# Altium PCB PCB1.PcbDoc
Units mil, origin at the board's own origin, x right, y up, seen from the top; angles counter-clockwise.
Board outline 6000 x 4000 mil, 2 copper layers (Top Layer, Bottom Layer); 27 components, 18 nets, 85 pads, 5 vias.
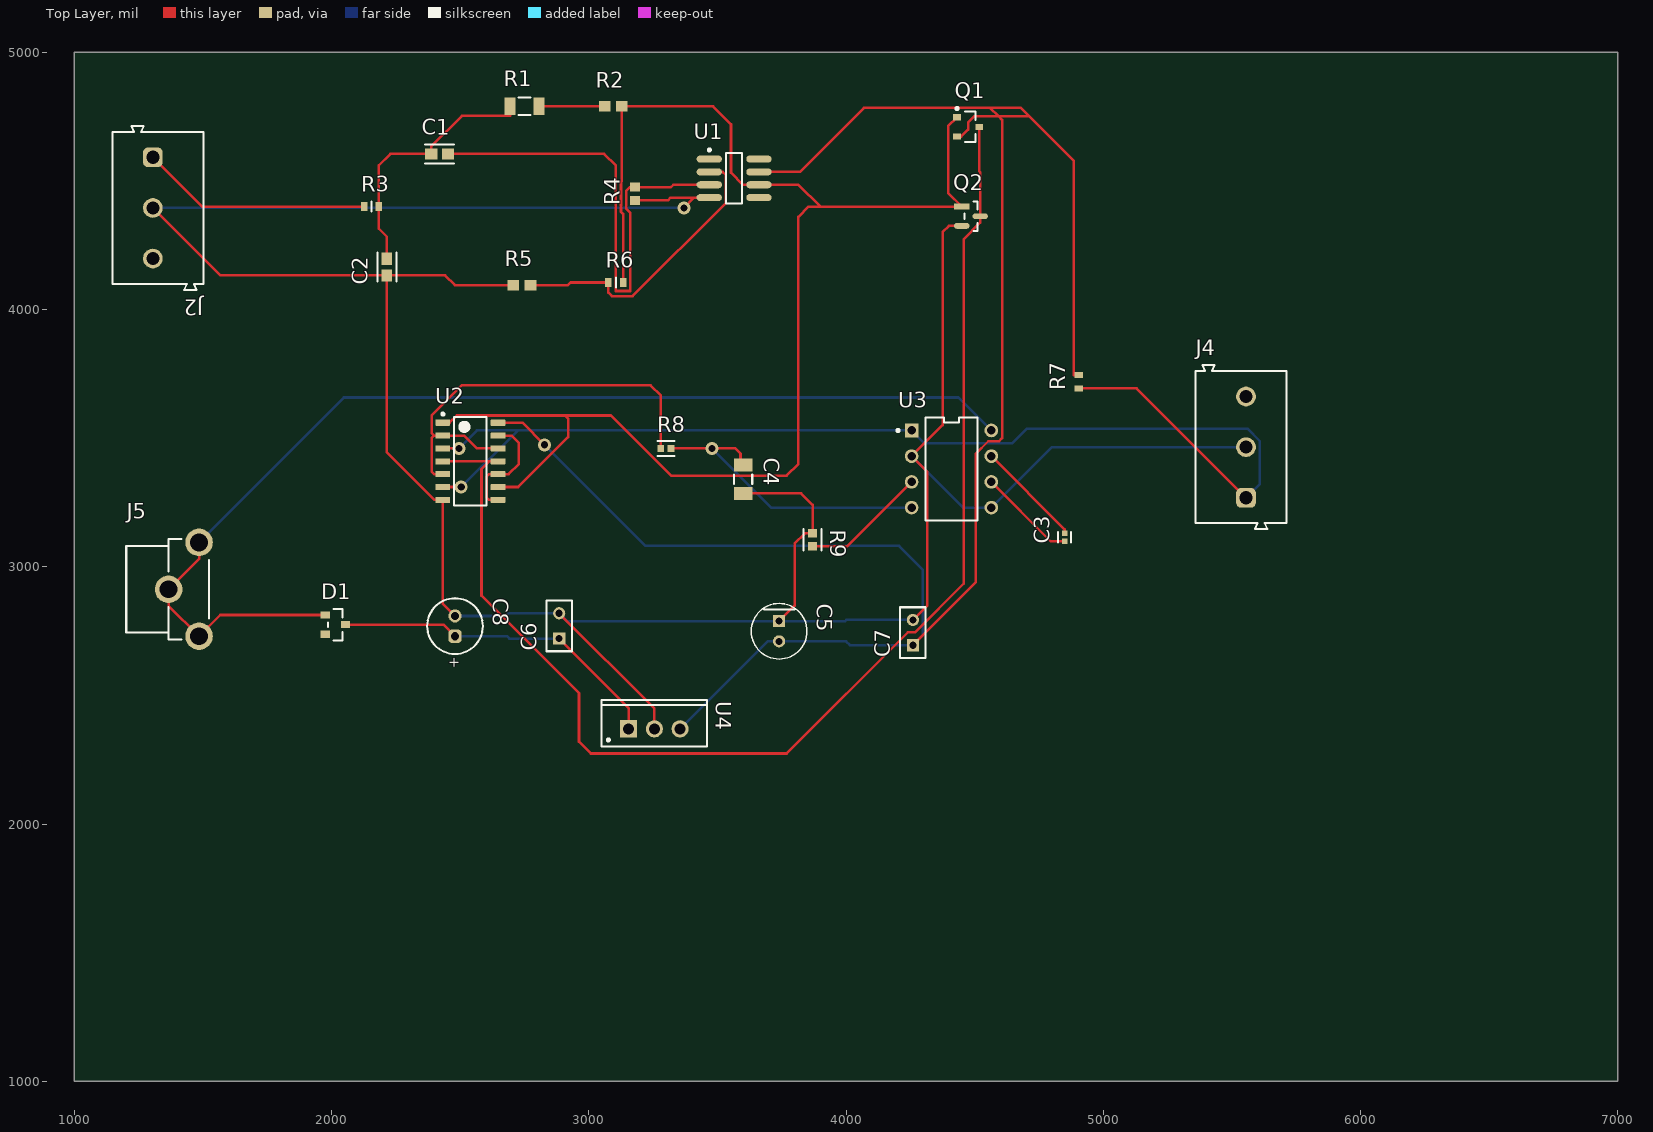
[diagram p0: Top Layer view]
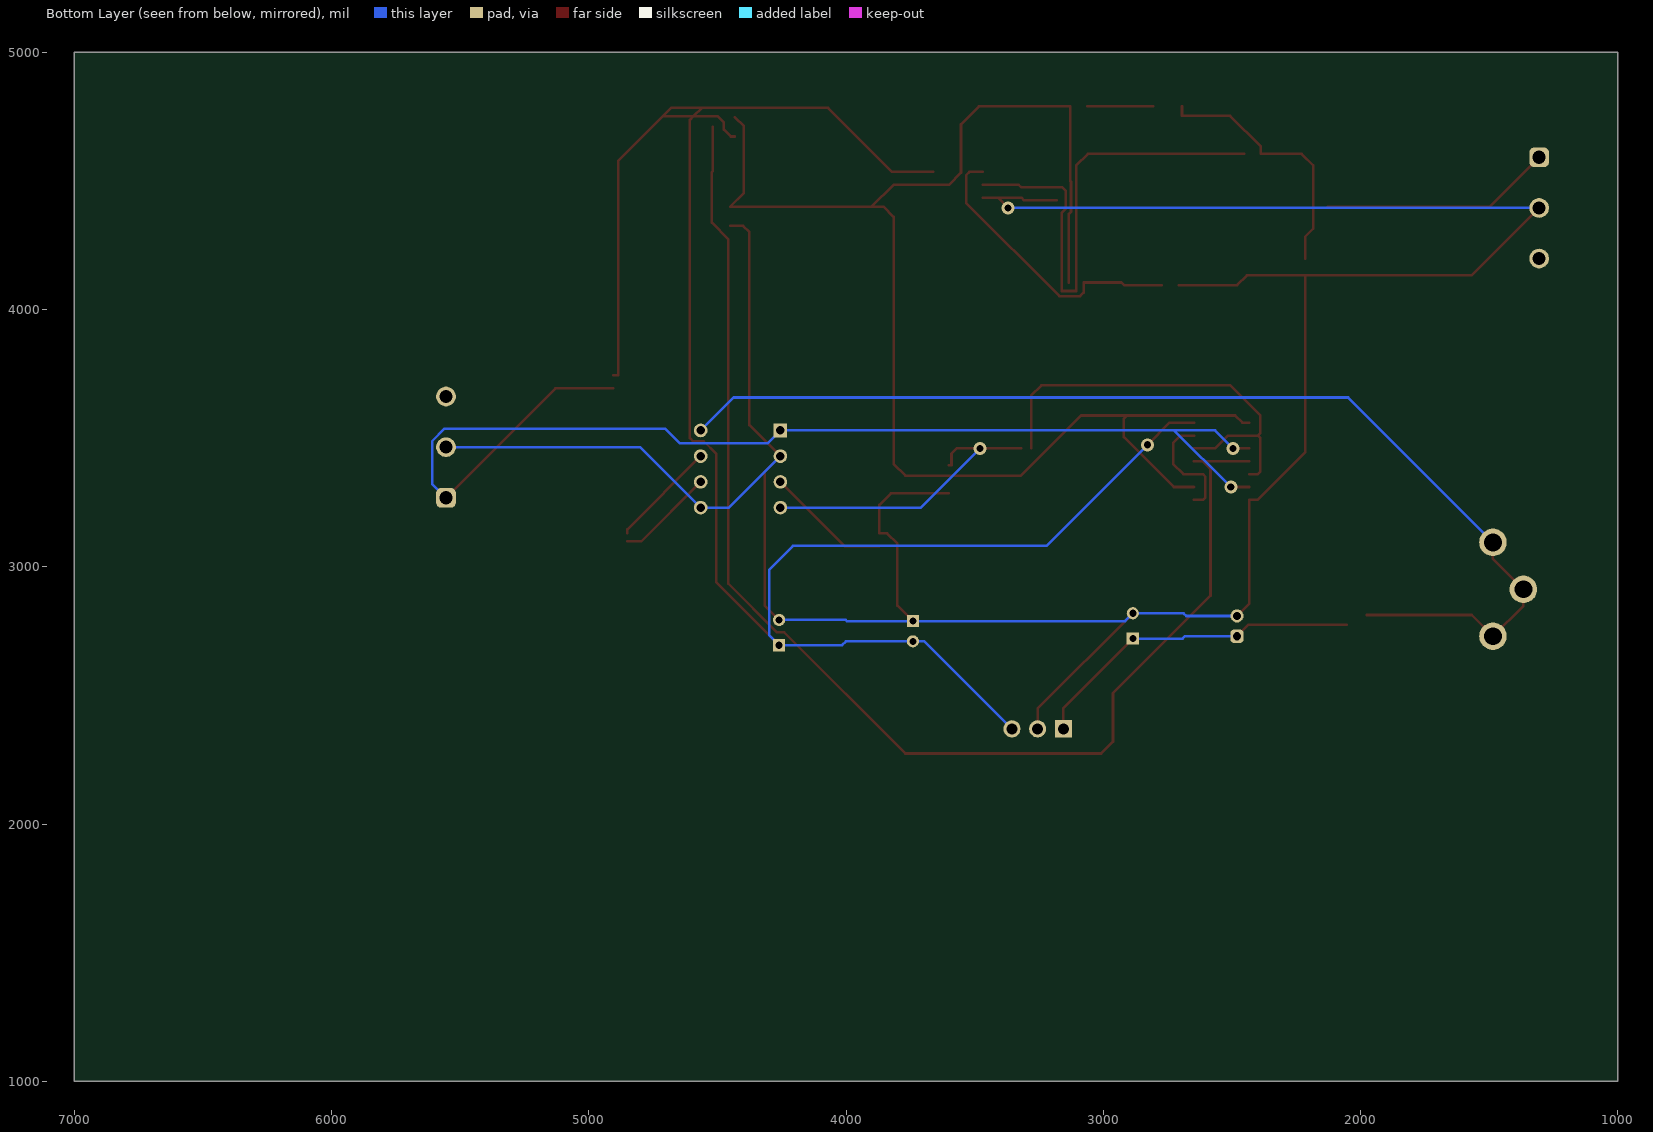
[diagram p1: Bottom Layer view, seen from below]
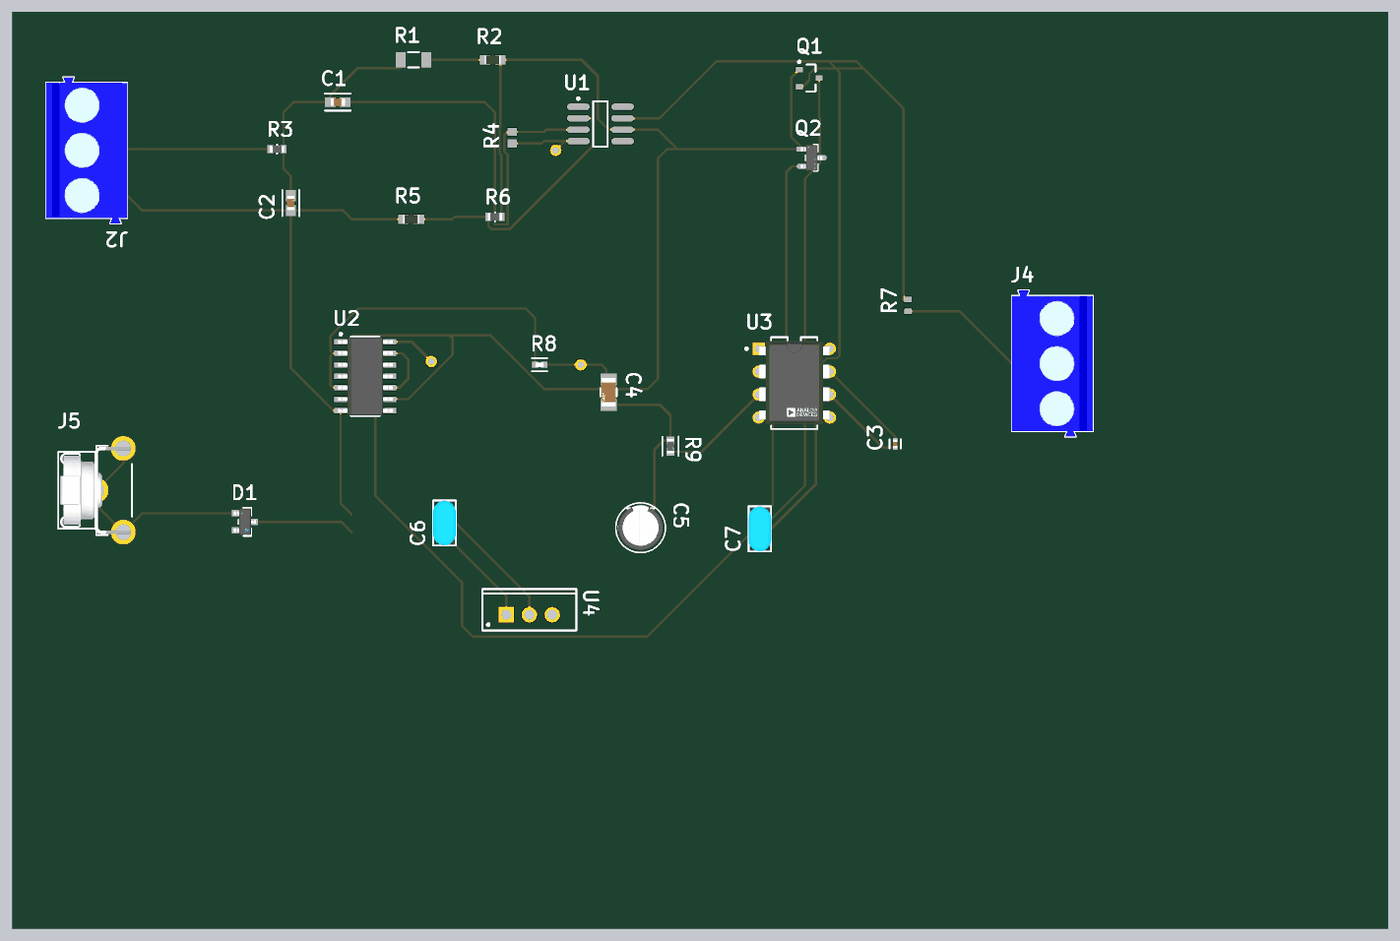
[diagram p2: 3D render of the assembled board from above, using the file's embedded part models]

## Layer stack, top to bottom
Top Solder: solder mask 0.4, Solder Resist, Dk 3.5
Top Layer: signal copper 1.4
Dielectric 1: dielectric 12.6, FR-4, Dk 4.8
Bottom Layer: signal copper 1.4
Bottom Solder: solder mask 0.4, Solder Resist, Dk 3.5

## Board outline
1000,1000 7000,1000 7000,5000 1000,5000

## Design rules (kind name [scope] priority, off if disabled: settings)
Clearance [All] p1: gap=10 ignorepadtopadclearanceinfootprint=FALSE except(0: Arc-Hole Track-Hole SMDPad-Hole THPad-Hole Via-Hole Fill-Hole Poly-Hole Region-Hole Text-Hole)
PolygonConnect [All] p1: connectstyle=Relief reliefconductorwidth=10 reliefentries=4 polygonreliefangle="90 Angle" airgapwidth=10
RoutingVias [All] p1: holewidth=28 width=50 viastyle="Through Hole" minholewidth=28 minwidth=50 maxholewidth=28 maxwidth=50
SolderMaskExpansion [All] p1: expansion=4 istentingtop=FALSE
Width [All] p1: maxlimit=10 minlimit=10 preferedwidth=10
30 further rules are at their usual default settings.

## Components (designator, comment, footprint, x,y, rotation, side; value= is the part's Value field where it differs from the comment)
C1 "1n" FP-0603-L_1_6_0_15-W_0_81-IPC_A 2420,4605 r0 top
C2 "1n" FP-0603-L_1_6_0_15-W_0_81-IPC_A 2215,4165 r90 top
C3 "100pF" FP-C0402-BB-MFG 4850,3115 r90 top value="100 pF"
C4 "4.7nF" FP-1206-L_3_2_0_2-W_1_6_0-IPC_B 3600,3340.15 r270 top
C5 "10 uF" FP-RAD-TH-D_5_0_5-L_11_1-MFG 3740,2749.37 r270 top
C6 "0.1 uF" FP-RDE0P1-MFG 2885,2770 r90 top
C7 "0.1 uF" FP-RDE0P1-MFG 4260,2744.21 r90 top
C8 "0.22 uF" WCAP-ATG8_D5H11 52480,-47230.63 r270 top
D1 "BAS70-00-E3-08" FP-6_541-5014_01-4-MFG 2015,2775 r0 top value=1.5pF
J2 "691101710003" 691101710003 1325,4395 r270 top
J4 "691101710003" 691101710003 5535.31,3465.01 r90 top
J5 "594" FP-594-MFG 1362.36,2912.48 r90 top
Q1 "PMOS" INF-SOT23_L 4475,4710 r0 top
Q2 "NMOS" FP-318-08-IPC_B 4485.83,4362.6 r0 top
R1 "RC1206FR-074K7L" FP-RC1206-0_65-IPC_B 2750,4790 r0 top
R2 "ERJ-3EKF1201V" RESC1609X55X30ML15T15 3095,4790 r0 top
R3 "ERA-3AEB242V" FP-ERA3A-MFG 2155,4400 r0 top
R4 "ERA-3AEB562V" RESC1608X55X30NL20T20 3180,4450 r90 top
R5 "ERJ-3EKF1201V" RESC1609X55X30ML15T15 2740,4095 r0 top
R6 "ERA-3AEB242V" FP-ERA3A-MFG 3105,4105 r0 top
R7 "2.2k" RESC1608X55X25LL10T15 4905,3719.41 r90 top
R8 "4.7K" FP-CRCW0402-e3-IPC_A 3299.77,3460 r0 top
R9 "10K" FP-ERA3A-IPC_C 3870,3105 r270 top
U1 "LT1028CS8#PBF" LT-S8-8_M 3565,4510 r0 top
U2 "CD4007UBMT" D0014A_N 2540,3410 r0 top
U3 "AD654JNZ" FP-N-8-MFG 4410,3380 r0 top
U4 "L7805CV" TO220 3255,2370 r0 top

## Footprints (in the part's own frame and the unit in brackets; to place one, negate y for a bottom-side part, rotate by r counter-clockwise, add the part's x,y. Pads: shape width x height; smd on the part's side, far side on the other; paste and mask are expansions set on the pad)
691101710003 [mm] "5,00mm - modular - blue - Horizontal entry with pressure clamp - 12,6mm height - 03p"
  rrect50% 1.95x1.95 hole 1.3: 1(-5,-0.5)
  round 1.95 hole 1.3: 2(0,-0.5) 3(5,-0.5)
  silkscreen extent -8.1,-4.5 8.1,4.5, body extent -8.1,-4.5 8.1,4.5, height 12.65
D0014A_N [mm] "SOIC, 14-Leads, Body 8.75x4mm, Pitch 1.27mm, IPC Medium Density"
  rrect17% 1.45x0.6 smd: 1(-2.725,3.81) 2(-2.725,2.54) 3(-2.725,1.27) 4(-2.725,0) 5(-2.725,-1.27) 6(-2.725,-2.54) 7(-2.725,-3.81) 8(2.725,-3.81) 9(2.725,-2.54) 10(2.725,-1.27) 11(2.725,0) 12(2.725,1.27) 13(2.725,2.54) 14(2.725,3.81)
  silkscreen extent -2.85,-4.37 1.6,4.78, body extent -3.02,-4.32 3.02,4.32, height 1.59
FP-6_541-5014_01-4-MFG [mm]
  rect 0.9x0.7 smd paste+0 mask+0: 1(-1,0.95) 2(-1,-0.95) 3(1,0)
  silkscreen extent -0.72,-1.55 0.72,1.55, body extent -1.55,-1.65 1.55,1.65, height 0.25
FP-318-08-IPC_B [mm]
  rect 1.524x0.578 smd paste+0 mask+0: 1(-0.91,0.95)
  rrect100% 1.524x0.578 smd paste+0 mask+0: 2(-0.91,-0.95) 3(0.91,0)
  silkscreen extent -0.65,-1.45 0.65,1.45, body extent -1.92,-1.7 1.92,1.7, height 0.25
FP-594-MFG [mm]
  round 2.72 hole 1.77 paste-2539.97 mask+0: 1(-4.635,-3.115) 1(0,-0.115) 1(4.635,-3.115)
  silkscreen extent -4.95,-4.08 4.95,4.07, body extent -6.09,-4.57 6.09,4.18, height 0.25
FP-0603-L_1_6_0_15-W_0_81-IPC_A [mil]
  rect 47.5x42.06 smd paste+0 mask+0: 1(-32.51,0) 2(32.51,0)
  silkscreen extent -56,-37 56,37, body extent -76,-41 76,41, height 10
FP-1206-L_3_2_0_2-W_1_6_0-IPC_B [mil]
  rect 51.36x71.11 smd paste+0 mask+0: 1(-55.15,0) 2(55.15,0)
  silkscreen extent -18,-36 18,36, body extent -91,-45 91,45, height 10
FP-C0402-BB-MFG [mm]
  rect 0.52x0.52 smd paste+0 mask+0: 1(-0.4,0) 2(0.4,0)
  silkscreen extent -0.5,-0.64 0.5,0.64, body extent -0.8,-0.4 0.8,0.4, height 0.25
FP-CRCW0402-e3-IPC_A [mil]
  rect 26.31x26.48 smd paste+0 mask+0: 1(-19.77,0) 2(19.77,0)
  silkscreen extent -33,-29 33,29, body extent -41,-21 41,21, height 10
FP-ERA3A-IPC_C [mil]
  rect 33.66x35.68 smd paste+0 mask+0: 1(-24.63,0) 2(24.63,0)
  silkscreen extent -41,-35 41,35, body extent -45,-24 45,24, height 10
FP-ERA3A-MFG [mm]
  rect 0.65x0.9 smd paste+0 mask+0: 1(-0.725,0) 2(0.725,0)
  silkscreen extent 0,-0.5 0,0.5, body extent -1.15,-0.6 1.15,0.6, height 0.25
FP-N-8-MFG [mm]
  rect 1.35x1.35 hole 0.85 paste-2539.97 mask+0: 1(-3.937,3.81)
  round 1.35 hole 0.85 paste-2539.97 mask+0: 2(-3.937,1.27) 3(-3.937,-1.27) 4(-3.937,-3.81) 5(3.937,-3.81) 6(3.937,-1.27) 7(3.937,1.27) 8(3.937,3.81)
  silkscreen extent -5.41,-5.08 2.56,5.08, body extent -4.71,-5.18 4.71,5.18, height 0.25
FP-RAD-TH-D_5_0_5-L_11_1-MFG [mm]
  rect 1.2x1.2 hole 0.7 paste-2539.97 mask+0: 1(-1,0)
  round 1.2 hole 0.7 paste-2539.97 mask+0: 2(1,0)
  silkscreen extent -2.75,-2.75 2.75,2.75, body extent -2.85,-2.85 2.85,2.85, height 0.25
FP-RC1206-0_65-IPC_B [mil]
  rect 41.66x67.41 smd paste+0 mask+0: 1(-56.18,0) 2(56.18,0)
  silkscreen extent -24,-34 24,34
FP-RDE0P1-MFG [mm]
  rect 1.2x1.2 hole 0.7 paste-2539.97 mask+0: 1(-1.25,0)
  round 1.2 hole 0.7 paste-2539.97 mask+0: 2(1.25,0)
  silkscreen extent -2.5,-1.25 2.5,1.25, body extent -2.6,-1.35 2.6,1.35, height 0.25
INF-SOT23_L [mm] "SOT23, 3-Leads, Body 2.9x1.3 mm, Pitch 0.95 mm, IPC High Density"
  rect 0.75x0.6 smd: 1(-1.1,0.95) 2(-1.1,-0.95) 3(1.1,0)
  silkscreen extent -1.22,-1.5 0.7,1.92, body extent -0.7,-1.5 0.7,1.5, height 1.1
LT-S8-8_M [mm] "SOIC, 8-Leads, Body 4.9x3.9mm, Pitch 1.27mm, IPC Low Density"
  oval 2.5x0.7 smd: 1(-2.45,1.905) 2(-2.45,0.635) 3(-2.45,-0.635) 4(-2.45,-1.905) 5(2.45,-1.905) 6(2.45,-0.635) 7(2.45,0.635) 8(2.45,1.905)
  silkscreen extent -2.57,-2.5 0.8,2.93, body extent -2,-2.5 2,2.5, height 1.76
RESC1608X55X25LL10T15 [mm] "Chip Resistor, 2-Leads, Body 1.60x0.80mm, IPC High Density"
  rect 0.6x0.8 smd: 1(-0.65,0) 2(0.65,0)
  body extent -0.85,-0.45 0.85,0.45, height 0.55
RESC1608X55X30NL20T20 [mm] "Chip Resistor, 2-Leads, Body 1.60x0.80mm, IPC Medium Density"
  rect 0.9x1 smd: 1(-0.65,0) 2(0.65,0)
  body extent -0.9,-0.5 0.9,0.5, height 0.55
RESC1609X55X30ML15T15 [mm] "Chip Resistor, 2-Leads, Body 1.75x0.95mm, IPC Low Density"
  rect 1.15x1.05 smd: 1(-0.85,0) 2(0.85,0)
  body extent -0.87,-0.48 0.87,0.48, height 0.55
TO220 [mm] "TO, Thru-Hole, Vertical, Heatsink Mounted; 3 In-Line Leads; Pitch 2.54 mm"
  rect 1.7x1.7 hole 1.1: 1(-2.54,0)
  round 1.7 hole 1.1: 2(0,0) 3(2.54,0)
  silkscreen extent -5.2,-1.75 5.2,2.85, body extent -5.25,-1.8 5.25,2.9, height 19.7
WCAP-ATG8_D5H11 [mm] "Aluminum Electrolytic Capacitors, 5x11mm"
  rrect50% 1.3x1.3 hole 0.8: 1(-1269,-1270)
  round 1.3 hole 0.8: 2(-1271,-1270)
  silkscreen extent -1272.75,-1272.75 -1267.25,-1267.25, body extent -1272.49,-1272.5 -1267.5,-1267.5, height 11.31

## Part data
C1 C2: library part CMP-2006-04378-2, "General Purpose Ceramic Capacitor, 0603, 1nF, 10%, X7R, 15%, 50V", Capacitance=1nF, Case Code (Imperial)=0603, Case Code (Metric)=1608, Dielectric=X7R, Dielectric Material=Ceramic, Max Operating Temperature=125°C, Min Operating Temperature=-55°C, Package Quantity=4000, Tolerance=10%, Voltage=50V, Case/Package=0603, Construction=Flat, Contact Plating=Tin, Depth=0.81mm, Height=0.9mm, Lead Free="Lead Free", Length=1.6mm, Mount="Surface Mount", Number of Pins=2, Packaging="Tape and Reel", Radiation Hardening=No, REACH SVHC="No SVHC", RoHS Compliant=Yes, Series=-, Termination=SMD/SMT, Thickness=0.035inch, Voltage Rating=50V, Voltage Rating (DC)=50V, Weight=7.1E-05oz, Width=0.032inch
C3: library part CMP-2008-03050-3, "CAP CER 100PF 50V 10% NP0 0402", Capacitance="100 pF", Manufacturer=Kemet, Manufacturer Part Number=C0402C101K5GACTU, Package=C0402-BB, Temperature="-55°C to +125°C", Temperature Characteristic=C0G, Temperature Coefficient=15%, Temperature Range High=+125°C, Temperature Range Low=-55°C, Tolerance=0.1, Voltage Rating="50 V", Automotive=No, Category=Cap, ComponentLink2Description=Datasheet, ComponentLink2URL=https://content.kemet.com/datasheets/KEM_C1002_X7R_SMD.pdf, Device Class L1="Passive Components", Device Class L2=Capacitors, Device Class L3="Ceramic Capacitors", Digikey Description="CAP CER 100PF 50V 10% NP0 0402", Height=0.55mm, Ipc Land Pattern Name=CAPC10050X50, Lead Free=Yes, Material=Ceramic, Mouser Description="KEMET - C0402C101K5GACTU - CAP, C0G / NP0, 100PF, 50V, 0402", Octopart=https://octopart.com/c0402c101k5gactu-kemet-9144183, RoHS=TRUE
C4: library part CMP-04427-001905-1, "General Purpose Ceramic Capacitor, 1206, 4.7nF, 10%, X7R, 15%, 100V", Case Code (Imperial)=1206, Case Code (Metric)=3216, Dielectric=X7R, Dielectric Material=Ceramic, Insulation Resistance=100GR, Max Operating Temperature=125°C, Min Operating Temperature=-55°C, Package Quantity=1, Tolerance=10%, Voltage=100V, Capacitance=4.7nF, Case/Package=1206, Depth=1.6mm, Dissipation Factor=2.5%, Height=0.94mm, Lead Free="Lead Free", Length=3.2mm, Mount="Surface Mount", Number of Pins=2, Packaging="Tape and Reel", Radiation Hardening=No, REACH SVHC="No SVHC", RoHS Compliant=Yes, Termination=SMD/SMT, Thickness=0.037inch, Voltage Rating=100V, Voltage Rating (DC)=100V, Weight=0.000571oz, Width=0.063inch
C5: library part CMP-05427-001295-1, "Aluminum Electrolytic Capacitors (Radial Lead Type) 10uF ±20% 50V", Capacitance=10uF, Case/Package=Radial, Max Operating Temperature=105°C, Min Operating Temperature=-40°C, Ripple Current (AC)=250mA, Tolerance=20%, Voltage=50V, Construction=RADIAL, Diameter=5mm, Height=11mm, Impedance=340mR, Lead Diameter=0.5mm, Lead Pitch=2mm, Life (Hours)=5000Hour, REACH SVHC=Yes, RoHS Compliant=Yes, Series="FR Radial", Termination=Radial, Voltage Rating=50V
C6 C7: library part CMP-06035-036375-1, "Ceramic Capacitor 100nF ±10% 25V X7R Radial", Capacitance=100nF, Case/Package=Radial, Dielectric=X7R, Max Operating Temperature=125°C, Min Operating Temperature=-55°C, Package Quantity=500, Resistor Type=Ceramic, Tolerance=10%, Voltage Rating=25V, Height=3.5mm, Height - Seated (Max)=0.236inch, Lead Diameter=0.5mm, Lead Free="Lead Free", Lead Pitch=0.098inch, Length=0.197inch, Mount="Through Hole", Packaging=Bulk, Termination=Radial, Voltage Rating (DC)=25V, Width=0.098inch
C8: library part CMP-03913-54007281-1, "860010772002 WCAP-ATG8 Aluminum Electrolytic Capacitors", Capacitance=220nF, Case/Package=Radial, Leakage Current=3µA, Max Operating Temperature=85°C, Min Operating Temperature=-40°C, Ripple Current=4mA, Tolerance=20%, Voltage Rating=63V, Diameter=5mm, Dissipation Factor=9%, Height=11mm, Height - Seated (Max)=12.4968mm, Lead Pitch=2.0066mm, Length=11mm, Life (Hours)=2000hours, Mount="Through Hole", NexarPartId=54007281, Packaging="Tape & Box (TB)", Pitch=2mm, Polarity=Polar, REACH SVHC=Unknown, RoHS=Compliant, Voltage Rating (DC)=63V
D1: library part CMP-02539-000005-1, "DIODE SCHOTTKY 70V 200MA SOT23", Capacitance=1.5pF, Forward Current=200mA, Manufacturer=Vishay, Max Junction Temp=+125°C, Max Repetitive Reverse Voltage=70V, Max Surge Forward Current=600mA, Package=6.541-5014.01-4, Peak Reverse Current=0.02uA, Temperature="-55°C to +125°C", Temperature Range Low=-55°C, Automotive=No, Category=Diode, ComponentLink2Description=Datasheet, ComponentLink2URL=https://www.vishay.com/docs/85702/bas70.pdf, Device Class L1="Discrete Semiconductors", Device Class L2=Diodes, Device Class L3="Schottky Diodes", Digikey Description="DIODE SCHOTTKY 70V 200MA SOT23", Height=1.15mm, Lead Free=Yes, Manufacturer Part Number=BAS70-00-E3-08, Mouser Description="Schottky Diodes & Rectifiers 70 Volt 200mA Single", Octopart=https://octopart.com/bas70-00-e3-08-vishay-30324832, Reverse Voltage=70V, RoHS=TRUE, Temperature Range High=+125°C
J2 J4: library part CMP-1502-03257-2, Color=Blue, Current=16A, Max Operating Temperature=105°C, Min Operating Temperature=-40°C, Voltage=250V, Contact Material=Brass, Contact Plating=Tin, Current Rating=16A, Height=16.4mm, Housing Material=Nylon, Lead Pitch=5mm, Length=9mm, Mount="Through Hole", NexarPartId=8917705, Number of Contacts=3, Number of Levels=1, Number of Pins=3, Number of Positions Per Level=3, Packaging=Box, Pitch=5.0038mm, Plating=Steel, REACH SVHC=Unknown, RoHS=Compliant, Stripping Length=-7mm, Termination=Screw, Voltage Rating=250V, Width=16.2mm, Wire Gauge (Max)=26AWG, Wire Gauge (Min)=14AWG, Wire/Cable Gauge=26AWG
J5: library part CMP-19636-000029-1, "BATTERY CONTACT SNAP 9V PC PIN", Package Quantity=100, Body Material=Steel, Body Plating=Tin, Connector Type="Snap in", Contact Material=Steel, Contact Plating=Nickel, Contact Type=Snap-In, Gender=Female, Lead Free="Lead Free", Length=9.65mm, Material=Steel, Material Thickness=0.15inch, Mount="Through Hole", Number of Batteries=1, Number of Cells=1, Orientation="Right Angle", Packaging=Bulk, Reach SVHC Compliant=Yes, RoHS Compliant=Yes, Series=-, Termination="PC Pin", Thickness=0.015inch
Q1: library part CMP-2000-05970-1, "SIPMOS(R) Small-Signal-Transistor, -0.33 A, 2 Ohm, -60 V, 3-Pin SOT-23, RoHS, Tape and Reel", Manufacturer=Infineon, Package Description="3-Pin Small Outline Transistor Package, Body 2.9 x 1.3 mm, Pitch 0.95 mm", Package Reference=SOT23, Package Version=04/2016, Datasheet URL=http://media.digikey.com/pdf/Data%20Sheets/Infineon%20PDFs/BSS83P%20H6327.pdf, Datasheet Version="Rev. 1.5, 03/2012", Manufacturer URL=http://www.infineon.com/, Mounting Technology=SurfaceMount, Package URL=http://www.infineon.com/dgdl/Infineon-PG-SOT23-3-5_BSS83PH6327XTSA1-PD-v01_00-EN.pdf?fileId=5546d46254e133b40154f1b7e80354af, Packaging=Reel, Product Category=MOSFET, RoHS=Details
Q2: library part CMP-07173-000101-1, "MOSFET N-CH 50V 220MA SOT-23", Case/Package=SOT-23, Continuous Drain Current (ID)=220mA, Drain to Source Breakdown Voltage=50V, Drain To Source Resistance=3.5R, Gate to Source Voltage (Vgs)=20V, Input Capacitance=27pF, Max Operating Temperature=150°C, Max Power Dissipation=360mW, Min Operating Temperature=-55°C, On-State Resistance=6R, Package Quantity=1, Threshold Voltage=1.3V, Contact Plating=Tin, Current Rating=220mA, Drain to Source Voltage (Vdss)=50V, Dual Supply Voltage=50V, Element Configuration=Single, Fall Time=9ns, Height=0.93mm, Lead Free="Lead Free", Length=2.92mm, Mount="Surface Mount", Nominal Vgs=1.3V, Number of Elements=1, Number of Pins=3, Packaging="Tape and Reel", Power Dissipation=360mW, Radiation Hardening=No, Rds On Max=3.5R, REACH SVHC="No SVHC", Rise Time=9ns, Termination=SMD/SMT, Turn-Off Delay Time=20ns, Turn-On Delay Time=2.5ns, Voltage Rating (DC)=50V, Weight=0.03g, Width=1.3mm
R1: library part CMP-03412-037805-1, "RES SMD 4.7K OHM 1% 1/4W 1206", Case Code (Imperial)=1206, Case Code (Metric)=3216, Max Operating Temperature=155°C, Max Power Dissipation=250mW, Min Operating Temperature=-55°C, Package Quantity=1, Resistance=4.7kR, Resistance Tolerance=1%, Resistor Type="Thick Film", Temperature Coefficient=100ppm/°C, Voltage Rating=200V, Case/Package=1206, Construction=Rectangular, Depth=1.6mm, Features="Moisture Resistant", Height=0.026inch, Lead Free="Lead Free", Length=0.122inch, Military Standard=Not, Number of Pins=2, Number of Terminations=2, Packaging="Tape and Reel", Power Rating=250mW, RoHS Compliant=Yes, Series=RC, Size Code=1206, Termination=SMD/SMT, Tolerance=1%, Voltage Rating (DC)=200V, Width=0.063inch
R2 R5: library part CMP-2000-00214-2, "Chip Resistor, 1.2 KOhm, +/- 1%, 0.1 W, -55 to 155 degC, 0603 (1608 Metric), RoHS, Tape and Reel", Case Code (Imperial)=0603, Case Code (Metric)=1608, Manufacturer=Panasonic, Max Operating Temperature=155degC, Max Power Dissipation=100mW, Min Operating Temperature=-55degC, Package Description="2-Pin Surface Mount Device, Body 1.6 x 0.85 mm", Package Quantity=1, Resistance=1.2KOhm, Temperature Coefficient=100ppm/degC, Tolerance=1%, Voltage Rating=75V, Case/Package=0603, Composition=ThickFilm, Contact Plating=Tin, Datasheet URL=https://industrial.panasonic.com/cdbs/www-data/pdf/RDA0000/AOA0000C283.pdf, Datasheet Version=42095.0, Depth=0.8mm, Height=0.022inch, Lead Free=LeadFree, Length=1.6mm, Manufacturer URL=http://www.panasonic.com/, Military Standard=Not, Mount=SurfaceMount, Number of Pins=2, Number of Terminations=2, Package Reference=0603, Package URL=http://www.st.com/st-web-ui/static/active/en/resource/technical/document/datasheet/CD00001320.pdf, Packaging=TapeandReel, Power Rating=100mW, REACH SVHC=NoSVHC, RoHSCompliant=True, Termination=SMD/SMT, Voltage Rating (DC)=75V, Width=0.031inch
R3 R6: library part CMP-2000-00965-2, Case Code (Imperial)=0603, Case Code (Metric)=1608, Max Operating Temperature=155°C, Max Power Dissipation=100mW, Min Operating Temperature=-55°C, Resistance=2.4kΩ, Temperature Coefficient=25ppm/°C, Tolerance=0.1%, Voltage Rating=75V, Case/Package=0603, Composition="Thin Film", Contact Plating=Tin, Depth=800µm, Height=450µm, Lead Free="Lead Free", Length=1.6mm, Lifecycle Status=Production, Military Standard=Not, Mount="Surface Mount", NexarPartId=1173624, Number of Pins=2, Number of Terminations=2, Packaging="Tape & Reel", Power Rating=100mW, Radiation Hardening=No, REACH SVHC="No SVHC", RoHS=Compliant, Schedule B="8533210045, 8533210045", Termination=SMD/SMT, Voltage Rating (DC)=75V, Width=800µm
R4: library part CMP-2000-00094-1, Manufacturer=Panasonic, Part Number=ERA-3AEB562V
R7: library part CMP-2000-06934-1, "Thick Film Resistor, 2.2 KOhm, 100 mW, 50 V, +/- 1%, -55 to 155 degC, 2-Pin SMD (0603), RoHS, Tape and Reel", Case Code - in=0603, Case Code - mm=1608, Manufacturer=Yageo, Operating Temperature Range=-55Cto+155C, Package Description="2-Pin Surface Mount Device, Body 1.6 x 0.8 mm", Power Rating=100mW, Resistance=2.2kOhms, Temperature Coefficient=100PPM/C, Tolerance=1%, Voltage Rating=50V, Datasheet URL=http://www.yageo.com/documents/recent/PYu-RC_Group_51_RoHS_L_7.pdf, Datasheet Version="Rev. 7, 05/2017", Manufacturer URL=http://www.yageo.com/, Mounting Technology=SurfaceMount, Package Reference=0603, Packaging=Reel, Product=ThickFilmResistorsGeneralPurpose, Series=RC, Termination Style=SMD/SMT
R8: library part CMP-2002-00052-3, "RES Thick Film, 4.7kΩ, 5%, 0.063W, 200ppm/°C, 0402", Case Code (Imperial)=0402, Case Code (Metric)=1005, Max Operating Temperature=155°C, Max Power Dissipation=63mW, Min Operating Temperature=-55°C, Package Quantity=1, Resistance=4.7kR, Temperature Coefficient=200ppm/°C, Tolerance=5%, Voltage Rating=50V, Case/Package=0402, Composition="Thick Film", Contact Plating=Tin, Depth=0.5mm, Features="Automotive AEC-Q200", Height=0.35mm, Length=1mm, Military Standard=Not, Number of Terminations=2, Packaging="Tape and Reel", Power Rating=63mW, Radiation Hardening=No, Termination=SMD/SMT, Weight=2.3E-05oz, Width=0.5mm
R9: library part CMP-2000-00874-2, "RES SMD 10K OHM 0.1% 1/10W 0603", Case Code (Imperial)=0603, Case Code (Metric)=1608, Max Operating Temperature=155°C, Max Power Dissipation=100mW, Min Operating Temperature=-55°C, Package Quantity=5000, Resistance=10kR, Resistance Tolerance=0.1%, Resistor Type="Thin Film", Temperature Coefficient=25ppm/°C, Voltage Rating=75V, Case/Package=0603, Construction=Rectangular, Contact Plating=Tin, Depth=0.8mm, Height=0.45mm, Lead Free="Lead Free", Length=1.6mm, Military Standard=Not, Mount="Surface Mount", Number of Pins=2, Number of Terminations=2, Packaging="Tape and Reel", Power Rating=100mW, Radiation Hardening=No, REACH SVHC="No SVHC", RoHS Compliant=Yes, Series=ERA-3A, Size Code=0603, Technology="METAL FILM", Termination=SMD/SMT, Tolerance=0.1%, Voltage Rating (DC)=75V, Width=0.8mm
U1: library part CMP-0359-03082-2, "Single Channel, Low Noise, Low Drift Operational Amplifier, 75 MHz Typical GBW, 15 V/us Typical SR, 8 to 44 V, 8-Pin SOIC (S8-8), Commerical, Pb-Free", Linear Technology Part Number=LT1028, Manufacturer="Linear Technology", Channels (#)=1, ComponentLink1Description="Manufacturer URL", ComponentLink1URL=http://www.linear.com/, ComponentLink2Description=Datasheet, ComponentLink2URL=http://cds.linear.com/docs/en/datasheet/1028fb.pdf, ComponentLink3Description="Package Specification", ComponentLink3URL=http://cds.linear.com/docs/en/packaging/05081610_G_SO8.pdf, DatasheetVersion="Rev. B", GBW (MHz) Typical=75, Is (mA) Typical=7.4, Mounting Technology="Surface Mount", PackageDescription="8-Pin Plastic Small Outline, Body 4.9 x 3.9 mm, Pitch 1.27 mm", PackageReference=LT-S8-8, PackageVersion="Rev G", PartNumber=LT1028CS8#PBF, RevisionNote="URLs updated", RoHS=Pb-Free, SR (V/us) Typical=15, Type=VFB, Vos (mV) Typical=0.01, Vs Max (V)=44, Vs Min (V)=8
U2: library part CMP-1632-00001-2, "CMOS Dual Complementary Pair Plus Inverter, D0014A, SMALL T&R", F @ Nom Voltage(Max)(Mhz)=8, Generic Part Number=CD4007UB, ICC @ Nom Voltage(Max)(mA)=0.015, Manufacturer="Texas Instruments", Operating Temperature Range(C)="-55 to 125", Rating=Catalog, tpd @ Nom Voltage(Max)(ns)=60, Voltage(Nom)(V)=10, Bits(#)=2, Code_JEDEC=MS-012, DatasheetVersion=SCHS018C, Input Type=CMOS, Output Drive (IOL/IOH)(Max)(mA)=4/-4, Output Type=CMOS, PackageReference=D0014A, Schmitt Trigger=No, Technology Family=CD4000, VCC(Max)(V)=18, VCC(Min)(V)=3
U3: library part CMP-09081-000046-1, "IC V/F CONV 500KHZ 8DIP", Case/Package=PDIP, Dual Supply Voltage=9V, Frequency=500kHz, Max Dual Supply Voltage=18V, Max Input Voltage=14V, Max Operating Temperature=85°C, Max Output Current=20mA, Max Supply Voltage=36V, Min Dual Supply Voltage=5V, Min Operating Temperature=-40°C, Min Supply Voltage=4.5V, Nominal Supply Current=2.5mA, Operating Supply Voltage=28V, Accuracy=0.4%, Bandwidth=500kHz, Contact Plating=Tin, Height=3.43mm, Lead Free="Contains Lead", Length=9.27mm, Linearity=0.2%, Max Frequency=500kHz, Max Output Voltage=18V, Mount="Through Hole", Number of Pins=8, Operating Supply Current=2.5mA, Packaging=Rail/Tube, Radiation Hardening=No, REACH SVHC="No SVHC", RoHS Compliant=Yes, Series=-, Supply Current=2.5mA, Supply Type=Dual, Weight=0.032805oz, Width=7.24mm
U4: library part CMP-0244-00483-1, "Positive Voltage Regulator, 5V, 3-Pin TO-220", ComponentLink1Description="Manufacturer URL", ComponentLink1URL=http://www.st.com, ComponentLink2Description=Datasheet, ComponentLink2URL=http://www.st.com/internet/com/TECHNICAL_RESOURCES/TECHNICAL_LITERATURE/DATASHEET/CD00000444.pdf, ComponentLink3Description="Package Specification", ComponentLink3URL=http://www.st.com/internet/com/TECHNICAL_RESOURCES/TECHNICAL_LITERATURE/PACKAGE_INFORMATION/CD00004649.pdf, DatasheetVersion=16/11/2011, PackageDescription="TO, Thru-Hole, Vertical, Heatsink Mounted; 3 In-Line Leads; Pitch 2.54 mm", PackageReference=TO220, PackageVersion=ver3.0

## Via types
v1: diameter 50, hole 28, Top Layer to Bottom Layer, 5 vias

## Nets (pads, with @x,y where several pads share a name; then routed paths per layer and width w, separated by ;. In a path a pad name is that pad's centre, name@x,y a point inside that pad or via, vN(x,y) a via of type N, cw(c..) or ccw(c..) an arc to the next point about the centre after c; other vN are vias at no path point)
+5: C5.2 C7.1 Q1.2 R7.2 U1.7 U2.14 U4.3 | length 8120.7
  Top Layer w10: U2.14 2742,3560 v1(2828,3474) ; U1.7 3821,4535 4070,4784 4560,4784 ; C7.1 4505,2940 4505,3440 4553,3488 4595,3488 4607,3500 4607,4737 4592,4752 ; Q1.2 4447.6,4672.6 4475,4700 4475,4727 4500,4752 4592,4752 ; R7.2 4886,3745 4886,4578 4712,4752 ; 4560,4784 4592,4752 ; 4560,4784 4680,4784 4712,4752 ; 4592,4752 4712,4752
  Bottom Layer w10: v1(2828,3474) 3221,3081 4206,3081 4299,2988 4299,2734 C7.1 4015,2695 4000,2710 C5.2 3695,2710 U4.3
+9V: D1.1 J5.1 U3.8 | length 4353.8
  Top Layer w10: J5.1@1485,3094.96 1485,3030.59 1366.89,2912.48 1366.89,2848.11 1485,2730 1567.4,2812.4 D1.1
  Bottom Layer w10: J5.1@1485,3094.96 2048.04,3658 4437,3658 U3.8
GND: C2.1 C4.2 C5.1 C6.2 C7.2 C8.2 J2.2 J4.2 Q2.2 R4.1 R5.1 R9.1 U1.4 U2.7 U3.2 U3.5 U4.2 | length 11776
  Top Layer w10: J2.2 1567.84,4132.49 C2.1 ; C8.2 2432.72,2856.02 U2.7 2400,3260 2215,3445 C2.1 ; R5.1 2479.49,4095 2442,4132.49 C2.1 ; C6.2 3255,2449.21 U4.2 ; R4.1 3307.41,4424.41 3318,4435 3410,4435 ; v1(3370,4395) 3410,4435 ; U1.4 3410,4435 ; C4.2 3825,3285 3870,3240 R9.1 3840,3129.63 3800,3089.63 3800,2848.74 C5.1 ; C7.2 4316.58,2850 4316.58,3368.42 U3.2 4376,3551 4376,4301.2 4400,4325.2 Q2.2
  Bottom Layer w10: J2.2 v1(3370,4395) ; C8.2 2677,2808.74 2687.47,2819.21 C6.2 2915.47,2788.74 C5.1 3997,2788.74 4001.69,2793.43 C7.2 ; U3.2 4455,3230 U3.5 4800,3465 J4.2
NetC1_1: C1.1 C2.2 R1.1 R3.2 | length 1019.8
  Top Layer w10: C2.2 2215,4283 2183.54,4314.46 R3.2 2183.54,4560 2228.54,4605 C1.1 2387.49,4633.97 2506.33,4752.82 2693.82,4752.82 R1.1
NetC1_2: C1.2 R4.2 U1.3 | length 1944.2
  Top Layer w10: C1.2 3060,4605 3105,4560 3105,4072 3161.34,4072 3161.34,4375.97 3145.31,4392 3145.31,4460.9 3160,4475.59 R4.2 3319,4475.59 3328.41,4485 U1.3
NetC3_1: C3.1 U3.6 | length 380.6
  Top Layer w10: U3.6 4795.75,3099.25 C3.1
NetC3_2: C3.2 U3.7 | length 417.3
  Top Layer w10: U3.7 4850,3145 C3.2
NetC4_1: C4.1 R8.2 U3.4 | length 1204.7
  Top Layer w10: R8.2 v1(3479,3460) 3570,3460 3590,3440 3590,3395.3 C4.1
  Bottom Layer w10: v1(3479,3460) 3709,3230 U3.4
NetC6_1: C6.1 C8.1 D1.3 U4.1 | length 1315.7
  Top Layer w10: D1.3 2435,2775 C8.1 ; C6.1 3155,2450.79 U4.1
  Bottom Layer w10: C8.1 2682,2730 2691.21,2720.79 C6.1
NetQ1_1: Q1.1 Q2.1 R2.2 R6.2 U1.6 U2.1 U2.9 | length 5679.9
  Top Layer w10: U2.1 2459,3560 2487,3588 2908,3588 ; U2.9 2725.7,3310 2920,3504.3 2920,3576 2908,3588 ; R6.2 3133.54,4371.69 3125.31,4379.92 3125.31,4496.58 3128.46,4499.73 R2.2 3483,4790 3553,4720 3553,4532 3600,4485 U1.6 3815,4485 3900,4400 ; Q1.1 4397,4712.71 4397,4453 Q2.1 3900,4400 ; 2908,3588 3086,3588 3320,3354 3769,3354 3815,3400 3815,4360 3855,4400 3900,4400
NetQ1_3: Q1.3 Q2.3 U2.4 U2.11 | length 5065.6
  Top Layer w10: U2.4 2613,3410 ; U2.11 2613,3410 ; Q1.3 4518.31,4537.36 4521.67,4534 Q2.3 4521.67,4337.67 4457,4273 4457,2934 4268,2745 4240,2745 3769,2274 3008,2274 2962,2320 2962,2509 2583,2888 2583,3380 2613,3410
NetR1_2: R1.2 R2.1 | length 255.4
  Top Layer w10: R1.2 R2.1
NetR5_2: R5.2 R6.1 U1.2 | length 1135.9
  Top Layer w10: R5.2 2919,4095 2929,4105 R6.1 3076.46,4065.54 3090,4052 3170,4052 3533,4415 3533,4522 3520,4535 U1.2
NetR8_1: R8.1 U2.2 U2.5 U2.12 | length 1704.2
  Top Layer w10: U2.5 2399,3360 2389,3370 2389,3500 2399,3510 ; U2.12 2565,3460 2515,3510 U2.2 2399,3510 ; R8.1 3280,3665 3240,3705 2506,3705 2389,3588 2389,3520 2399,3510
NetR9_2: R9.2 U3.3 | length 488.4
  Top Layer w10: R9.2 4005.37,3080.37 U3.3
NetU2_8: U2.8 U2.10 U2.13 | length 448.5
  Top Layer w10: U2.8 2613,3260 2603,3270 2603,3350 2613,3360 U2.10 2688,3360 2728,3400 2728,3482 2700,3510 U2.13
Vin: J2.1 R3.1 | length 900.6
  Top Layer w10: J2.1 1497.17,4400 R3.1
Vsqr: J4.1 R7.1 U2.3 U2.6 U3.1 | length 4720.8
  Top Layer w10: U2.6 v1(2504,3310) ; U2.3 v1(2495,3460) ; R7.1 5129.33,3693.82 J4.1
  Bottom Layer w10: v1(2495,3460) 2565,3530 2724,3530 ; v1(2504,3310) 2724,3530 ; J4.1 5609,3322.15 5609,3488 5560,3537 4703,3537 4646,3480 4305,3480 U3.1 2724,3530
pads on no net: D1.2 J2.3 J4.3 U1.1 U1.5 U1.8

## Text inside footprints (layer, text, board x,y; h text height)
C8: Top Overlay "+" at 2460.32,2649.29 h39.37 r270